# EAGLE board 6 servo motors  (EAGLE 9.7.0)

Size 552.74 x 80.45 mm. Coordinates in mm from the lower left corner, seen from the top.
Outline: 0,0 552.74,0 552.74,80.45 0,80.45 0,0
Copper layers (1*16): Top 0.035mm / dielectric 1.5mm / Bottom 0.035mm
Design rules "default": minimum track width 6mil, minimum drill 0.35mm, track to track 6mil, track to pad 6mil, pad to pad 6mil, via to via 6mil, smd to smd 6mil, copper to edge 40mil, drill to drill 6mil, minimum pad ring 10mil, minimum via ring 8mil, stop-mask expansion 4mil, vias tented up to drill 0mil, thermal gap 10mil

## Footprints (pad centres in the part's own frame; a part is rotated, then mirrored left to right if it is on the bottom)
1X02 = drill 1.016 long: 1 -1.27,0; 2 1.27,0
RESAD1016W63L850D250B = drill 0.83 pad 1.43: 1 -5.08,0; 2 5.08,0
SG90 = drill 1.016 long: 1 -2.54,0; 2 0,0; 3 2.54,0
ARDUINO-UNO-R3-SHIELD = drill 1.016 pad 1.88: 3.3V 24.13,-2.54; 5V 24.13,0; A0 24.13,12.7; A1 24.13,15.24; A2 24.13,17.78; A3 24.13,20.32; A4 24.13,22.86; A5 24.13,25.4; AREF -24.13,-13.97; D2 -24.13,20.32; D3 -24.13,17.78; D4 -24.13,15.24; D5 -24.13,12.7; D6 -24.13,10.16; D7 -24.13,7.62; D8 -24.13,3.81; D9 -24.13,1.27; D10 -24.13,-1.27; D11 -24.13,-3.81; D12 -24.13,-6.35; D13 -24.13,-8.89; GND@0 24.13,2.54; GND@1 24.13,5.08; GND@2 -24.13,-11.43; IOREF 24.13,-7.62; NC 24.13,-10.16; RES 24.13,-5.08; RX -24.13,25.4; SCL -24.13,-19.05; SDA -24.13,-16.51; TX -24.13,22.86; VIN 24.13,7.62

## Placement (x,y rotation side)
R1  FLEX-SENSOR  [1X02]  77.59,14.04 0 top
R2  FLEX-SENSOR  [1X02]  114.44,14.04 0 top
R3  FLEX-SENSOR  [1X02]  151.29,14.29 0 top
R4  FLEX-SENSOR  [1X02]  184.25,14.4 0 top
R5  10k  [RESAD1016W63L850D250B]  182.98,9.33 90 top
R6  10k  [RESAD1016W63L850D250B]  150.02,9.22 90 top
R7  10k  [RESAD1016W63L850D250B]  113.17,8.97 90 top
R8  10k  [RESAD1016W63L850D250B]  76.32,8.98 90 top
R9  FLEX-SENSOR  [1X02]  41.43,14.44 0 top
R10  1k  [RESAD1016W63L850D250B]  40.16,9.38 90 top
R11  FLEX-SENSOR  [1X02]  7.6,14.35 0 top
R12  1k  [RESAD1016W63L850D250B]  6.33,9.28 90 top
SERVO1  SERVOSG90  [SG90]  398.45,73.1 0 top
SERVO2  SERVOSG90  [SG90]  452.77,73.41 0 top
SERVO3  SERVOSG90  [SG90]  423.61,72.1 0 top
SERVO4  SERVOSG90  [SG90]  481.45,73.36 0 top
SERVO5  SERVOSG90  [SG90]  510.02,73.77 0 top
SERVO6  SERVOSG90  [SG90]  545.76,73.62 0 top
U1  ARDUINO-UNO-R3-SHIELD  [ARDUINO-UNO-R3-SHIELD]  303.55,50.6 270 top

## Library data of the parts
R1-R12 SERVO1-SERVO6 U1 = Tinkercad

## Nets
U1_5V: R1.2 R2.2 R3.2 R4.2 R9.2 R11.2 SERVO1.2 SERVO2.2 SERVO3.2 SERVO4.2 SERVO5.2 SERVO6.2 U1.5V
U1_A0: R4.1 R5.2 U1.A0
U1_A1: R3.1 R6.2 U1.A1
U1_A2: R2.1 R7.2 U1.A2
U1_A3: R1.1 R8.2 U1.A3
U1_A4: R9.1 R10.2 U1.A4
U1_A5: R11.1 R12.2 U1.A5
U1_D2: SERVO1.3 SERVO5.3 SERVO6.3 U1.D2
U1_D3: SERVO3.3 U1.D3
U1_D4: SERVO2.3 U1.D4
U1_D5: SERVO4.3 U1.D5
U1_GND: R5.1 R6.1 R7.1 R8.1 R10.1 R12.1 SERVO1.1 SERVO2.1 SERVO3.1 SERVO4.1 SERVO5.1 SERVO6.1 U1.GND@0 U1.GND@1 U1.GND@2

## Tracks (layer width: path | path; a pad name or v marks a point on that pad's centre or on a via)
U1_5V  (12 unrouted)
U1_A0  (2 unrouted)
U1_A1  (2 unrouted)
U1_A2  (2 unrouted)
U1_A3  (2 unrouted)
U1_A4  (2 unrouted)
U1_A5  (2 unrouted)
U1_D2  (3 unrouted)
U1_D3  (1 unrouted)
U1_D4  (1 unrouted)
U1_D5  (1 unrouted)
U1_GND  (14 unrouted)